# EAGLE board HM10 Breakout-Panel (EAGLE 9.6.2)
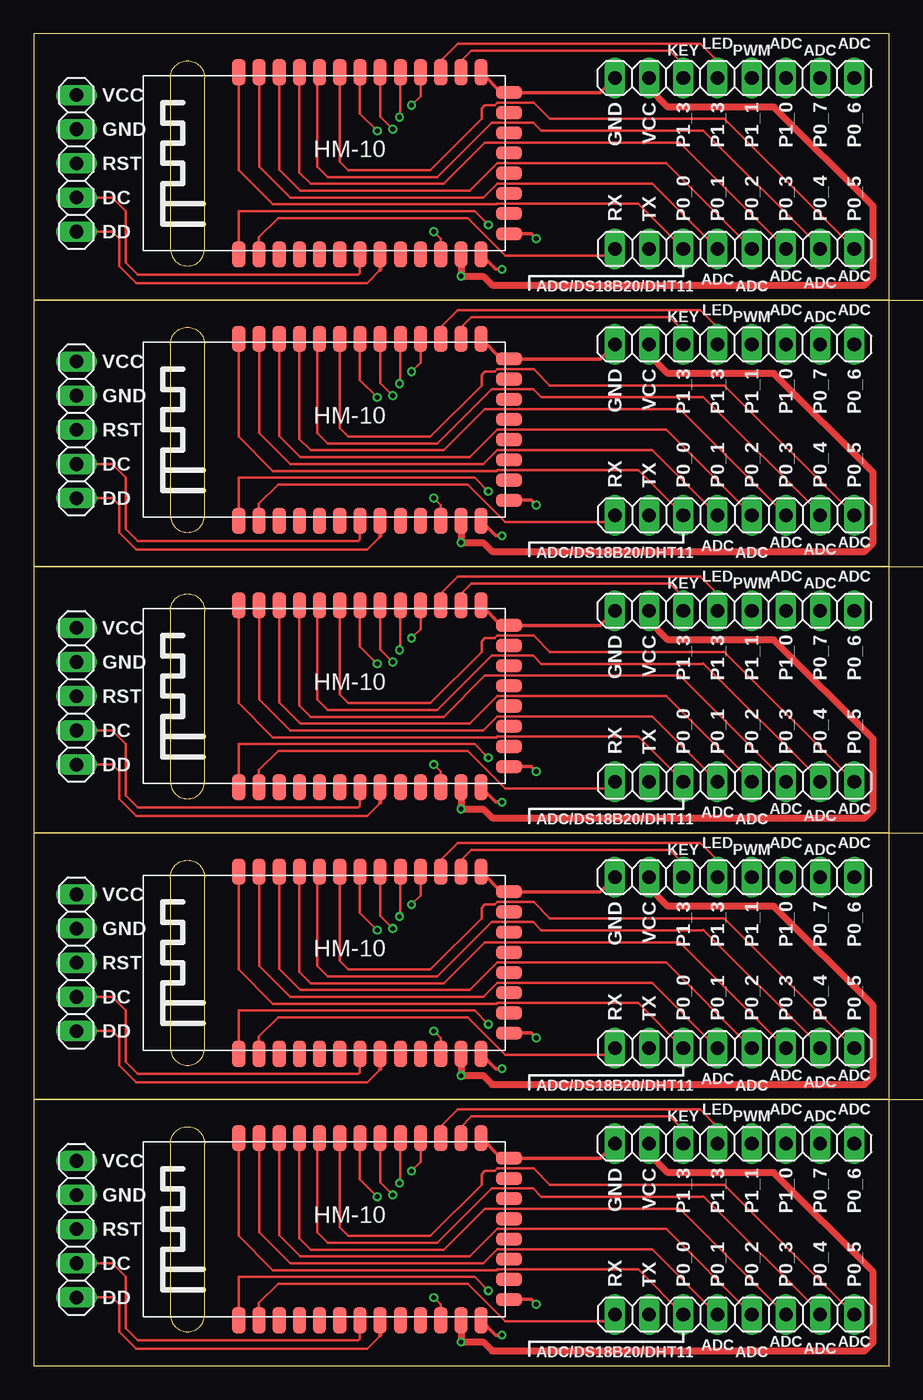
[diagram p0: board, top side]
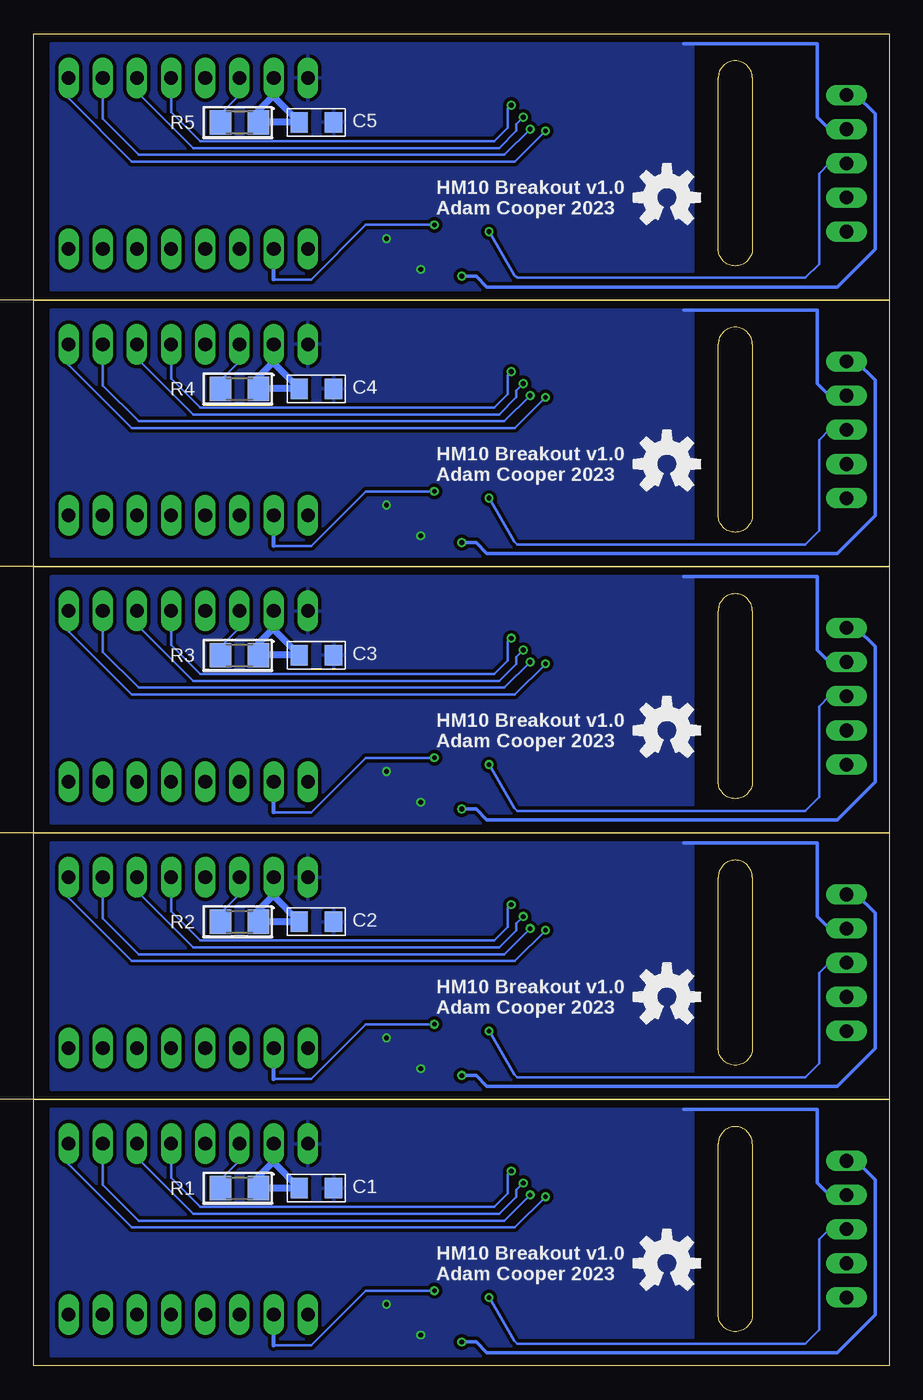
[diagram p1: board, bottom side, seen from below]

Size 63.55 x 99 mm. Coordinates in mm from the lower left corner, seen from the top.
Outline: 63.55,39.6 63.55,19.8 0,19.8 0,39.6
Outline: 63.55,39.6 0,39.6
Outline: 0,39.6 63.55,39.6
Outline: 63.55,39.6 63.55,59.4 0,59.4 0,39.6
Outline: 0,0 63.55,0 63.55,19.8 0,19.8 0,0
Outline: 0,59.4 63.55,59.4 63.55,79.2 0,79.2 0,59.4
Outline: 0,79.2 63.55,79.2 63.55,99 0,99 0,79.2
Copper layers (1*16): Top 0.035mm / dielectric 1.5mm / Bottom 0.035mm
Design rules "Seeed Fusion_eagle_rule_v1.1": minimum track width 6mil, minimum drill 12mil, track to track 6mil, track to pad 6mil, pad to pad 6mil, via to via 6mil, smd to smd 0mil, copper to edge 10mil, drill to drill 10mil, minimum pad ring 10mil, minimum via ring 6mil, stop-mask expansion 2mil, vias tented up to drill 100mil, thermal gap 10mil
Milling: 24 lines

## Footprints (pad centres in the part's own frame; a part is rotated, then mirrored left to right if it is on the bottom)
1206 = smd 1.27 x 1.524: 1 -1.27,0; 2 1.27,0
1X05 = drill 1.016 long: 1 -5.08,0; 2 -2.54,0; 3 0,0; 4 2.54,0; 5 5.08,0
1X08 = drill 1.016 long: 1 -8.89,0; 2 -6.35,0; 3 -3.81,0; 4 -1.27,0; 5 1.27,0; 6 3.81,0; 7 6.35,0; 8 8.89,0
R1206 = smd 1.6 x 1.803: 1 -1.422,0; 2 1.422,0
HM-10 = smd 1.93 x 0.965: 1 -6.77,6.35; 2 -6.77,4.85; 3 -6.77,3.35; 4 -6.77,1.85; 5 -6.77,0.35; 6 -6.77,-1.15; 7 -6.77,-2.65; 8 -6.77,-4.15; 9 -6.77,-5.65; 10 -6.77,-7.15; 11 -6.77,-8.65; 12 -6.77,-10.15; 13 -6.77,-11.65; 22 6.77,-11.65; 23 6.77,-10.15; 24 6.77,-8.65; 25 6.77,-7.15; 26 6.77,-5.65; 27 6.77,-4.15; 28 6.77,-2.65; 29 6.77,-1.15; 30 6.77,0.35; 31 6.77,1.85; 32 6.77,3.35; 33 6.77,4.85; 34 6.77,6.35 | smd 0.965 x 1.93: 14 -5.23,-13.72; 15 -3.73,-13.72; 16 -2.23,-13.72; 17 -0.73,-13.72; 18 0.77,-13.72; 19 2.27,-13.72; 20 3.77,-13.72; 21 5.27,-13.72

## Placement (x,y rotation side)
C1  100n  [1206]  42.55,13.21 0 bottom
C2  100n  [1206]  42.55,33.01 0 bottom
C3  100n  [1206]  42.55,52.81 0 bottom
C4  100n  [1206]  42.55,72.61 0 bottom
C5  100n  [1206]  42.55,92.41 0 bottom
JP1  [1X05]  3.17,10.16 90 top
JP2  [1X08]  52.07,3.81 0 top
JP3  [1X08]  52.07,16.51 180 top
JP4  [1X05]  3.17,29.96 90 top
JP5  [1X08]  52.07,23.61 0 top
JP6  [1X08]  52.07,36.31 180 top
JP7  [1X05]  3.17,49.76 90 top
JP8  [1X08]  52.07,43.41 0 top
JP9  [1X08]  52.07,56.11 180 top
JP10  [1X05]  3.17,69.56 90 top
JP11  [1X08]  52.07,63.21 0 top
JP12  [1X08]  52.07,75.91 180 top
JP13  [1X05]  3.17,89.36 90 top
JP14  [1X08]  52.07,83.01 0 top
JP15  [1X08]  52.07,95.71 180 top
LOGO1  OSHW-LOGOM  [OSHW-LOGO-M]  16.51,7.62 0 bottom
LOGO2  OSHW-LOGOM  [OSHW-LOGO-M]  16.51,27.42 0 bottom
LOGO3  OSHW-LOGOM  [OSHW-LOGO-M]  16.51,47.22 0 bottom
LOGO4  OSHW-LOGOM  [OSHW-LOGO-M]  16.51,67.02 0 bottom
LOGO5  OSHW-LOGOM  [OSHW-LOGO-M]  16.51,86.82 0 bottom
R1  1k  [R1206]  48.26,13.21 180 bottom
R2  1k  [R1206]  48.26,33.01 180 bottom
R3  1k  [R1206]  48.26,52.81 180 bottom
R4  1k  [R1206]  48.26,72.61 180 bottom
R5  1k  [R1206]  48.26,92.41 180 bottom
U1  HM-10  [HM-10]  21.59,10.16 90 top
U2  HM-10  [HM-10]  21.59,29.96 90 top
U3  HM-10  [HM-10]  21.59,49.76 90 top
U4  HM-10  [HM-10]  21.59,69.56 90 top
U5  HM-10  [HM-10]  21.59,89.36 90 top

## Library data of the parts
C1-C5 LOGO1-LOGO5 = Master 2016
JP1-JP15 = pinhead
R1-R5 = rcl; SPICEPREFIX: R
U1-U5 = SMD Stamp Modules

## Nets
DC: JP1.2 U1.7
DC1: JP4.2 U2.7
DC2: JP7.2 U3.7
DC3: JP10.2 U4.7
DC4: JP13.2 U5.7
DD: JP1.1 U1.8
DD1: JP4.1 U2.8
DD2: JP7.1 U3.8
DD3: JP10.1 U4.8
DD4: JP13.1 U5.8
GND: C1.2 JP1.4 JP3.8 U1.13 U1.14 U1.21 U1.22
GND1: C2.2 JP4.4 JP6.8 U2.13 U2.14 U2.21 U2.22
GND2: C3.2 JP7.4 JP9.8 U3.13 U3.14 U3.21 U3.22
GND3: C4.2 JP10.4 JP12.8 U4.13 U4.14 U4.21 U4.22
GND4: C5.2 JP13.4 JP15.8 U5.13 U5.14 U5.21 U5.22
P0_0: JP2.3 U1.34
P0_1: JP2.4 U1.33
P0_2: JP2.5 U1.32
P0_3: JP2.6 U1.31
P0_4: JP2.7 U1.30
P0_5: JP2.8 U1.29
P0_6: JP3.1 U1.28
P0_7: JP3.2 U1.27
P0_8: JP5.3 U2.34
P0_9: JP5.4 U2.33
P0_10: JP5.5 U2.32
P0_11: JP5.6 U2.31
P0_12: JP5.7 U2.30
P0_13: JP5.8 U2.29
P0_14: JP6.1 U2.28
P0_15: JP6.2 U2.27
P0_16: JP8.3 U3.34
P0_17: JP8.4 U3.33
P0_18: JP8.5 U3.32
P0_19: JP8.6 U3.31
P0_20: JP8.7 U3.30
P0_21: JP8.8 U3.29
P0_22: JP9.1 U3.28
P0_23: JP9.2 U3.27
P0_24: JP11.3 U4.34
P0_25: JP11.4 U4.33
P0_26: JP11.5 U4.32
P0_27: JP11.6 U4.31
P0_28: JP11.7 U4.30
P0_29: JP11.8 U4.29
P0_30: JP12.1 U4.28
P0_31: JP12.2 U4.27
P0_32: JP14.3 U5.34
P0_33: JP14.4 U5.33
P0_34: JP14.5 U5.32
P0_35: JP14.6 U5.31
P0_36: JP14.7 U5.30
P0_37: JP14.8 U5.29
P0_38: JP15.1 U5.28
P0_39: JP15.2 U5.27
P1_0: JP3.3 U1.26
P1_1: JP3.4 U1.25
P1_2: JP3.5 U1.24
P1_3: JP3.6 R1.2 U1.23
P1_4: JP6.3 U2.26
P1_5: JP6.4 U2.25
P1_6: JP6.5 U2.24
P1_7: JP6.6 R2.2 U2.23
P1_8: JP9.3 U3.26
P1_9: JP9.4 U3.25
P1_10: JP9.5 U3.24
P1_11: JP9.6 R3.2 U3.23
P1_12: JP12.3 U4.26
P1_13: JP12.4 U4.25
P1_14: JP12.5 U4.24
P1_15: JP12.6 R4.2 U4.23
P1_16: JP15.3 U5.26
P1_17: JP15.4 U5.25
P1_18: JP15.5 U5.24
P1_19: JP15.6 R5.2 U5.23
P2_0: U1.9
P2_1: U2.9
P2_2: U3.9
P2_3: U4.9
P2_4: U5.9
RST: JP1.3 U1.11
RST1: JP4.3 U2.11
RST2: JP7.3 U3.11
RST3: JP10.3 U4.11
RST4: JP13.3 U5.11
RX: JP2.1 U1.2
RX1: JP5.1 U2.2
RX2: JP8.1 U3.2
RX3: JP11.1 U4.2
RX4: JP14.1 U5.2
TX: JP2.2 U1.1
TX1: JP5.2 U2.1
TX2: JP8.2 U3.1
TX3: JP11.2 U4.1
TX4: JP14.2 U5.1
VCC: C1.1 JP1.5 JP3.7 R1.1 U1.12
VCC1: C2.1 JP4.5 JP6.7 R2.1 U2.12
VCC2: C3.1 JP7.5 JP9.7 R3.1 U3.12
VCC3: C4.1 JP10.5 JP12.7 R4.1 U4.12
VCC4: C5.1 JP13.5 JP15.7 R5.1 U5.12

## Tracks (layer width: path | path; a pad name or v marks a point on that pad's centre or on a via)
DC
  Top 0.203: U1.7 24.24,2.02 24.13,1.91 7.75,1.91 6.86,2.79 6.86,6.6 5.84,7.62 JP1.2
DC1
  Top 0.203: U2.7 24.24,21.81 24.13,21.7 7.75,21.7 6.86,22.59 6.86,26.4 5.84,27.42 JP4.2
DC2
  Top 0.203: U3.7 24.24,41.62 24.13,41.51 7.75,41.51 6.86,42.4 6.86,46.2 5.84,47.22 JP7.2
DC3
  Top 0.203: U4.7 24.24,61.41 24.13,61.3 7.75,61.3 6.86,62.19 6.86,66 5.84,67.02 JP10.2
DC4
  Top 0.203: U5.7 24.24,81.22 24.13,81.11 7.75,81.11 6.86,81.99 6.86,85.8 5.84,86.82 JP13.2
DD
  Top 0.203: JP1.1 5.84,5.08 6.35,4.57 6.35,2.54 7.62,1.27 24.77,1.27 25.74,2.25
  Top 0.305: U1.8 25.74,2.25
DD1
  Top 0.203: JP4.1 5.84,24.88 6.35,24.37 6.35,22.34 7.62,21.07 24.77,21.07 25.74,22.04
  Top 0.305: U2.8 25.74,22.04
DD2
  Top 0.203: JP7.1 5.84,44.68 6.35,44.17 6.35,42.14 7.62,40.87 24.77,40.87 25.74,41.85
  Top 0.305: U3.8 25.74,41.85
DD3
  Top 0.203: JP10.1 5.84,64.48 6.35,63.97 6.35,61.94 7.62,60.67 24.77,60.67 25.74,61.65
  Top 0.305: U4.8 25.74,61.65
DD4
  Top 0.203: JP13.1 5.84,84.28 6.35,83.77 6.35,81.74 7.62,80.47 24.77,80.47 25.74,81.44
  Top 0.305: U5.8 25.74,81.44
GND  (via drill 0.35 pad 0.61)
  Top 0.203: 34.74,15.43 U1.21
  Top 0.254: U1.13 34.34,2.29 v34.8,2.29 | U1.14 36.98,4.93 v37.34,4.57 | U1.21 42.1,15.43 JP3.8 | U1.22 34.74,15.43
  Bottom 0.152: JP1.4 4.45,12.7
  Bottom 0.254: 4.45,12.7 5.33,13.59 5.33,19.05 15.24,19.05
  pour Bottom (isolate 0.254): 14.61,19.05 14.61,0.76 62.23,0.76 62.23,19.05
GND1  (via drill 0.35 pad 0.61)
  Top 0.203: 34.74,35.23 U2.21
  Top 0.254: U2.13 34.34,22.09 v34.8,22.09 | U2.14 36.98,24.73 v37.34,24.37 | U2.21 42.1,35.23 JP6.8 | U2.22 34.74,35.23
  Bottom 0.152: JP4.4 4.45,32.5
  Bottom 0.254: 4.45,32.5 5.33,33.39 5.33,38.85 15.24,38.85
  pour Bottom (isolate 0.254): 14.61,38.85 14.61,20.56 62.23,20.56 62.23,38.85
GND2  (via drill 0.35 pad 0.61)
  Top 0.203: 34.74,55.03 U3.21
  Top 0.254: U3.13 34.34,41.89 v34.8,41.89 | U3.14 36.98,44.53 v37.34,44.17 | U3.21 42.1,55.03 JP9.8 | U3.22 34.74,55.03
  Bottom 0.152: JP7.4 4.45,52.3
  Bottom 0.254: 4.45,52.3 5.33,53.19 5.33,58.65 15.24,58.65
  pour Bottom (isolate 0.254): 14.61,58.65 14.61,40.36 62.23,40.36 62.23,58.65
GND3  (via drill 0.35 pad 0.61)
  Top 0.203: 34.74,74.83 U4.21
  Top 0.254: U4.13 34.34,61.69 v34.8,61.69 | U4.14 36.98,64.33 v37.34,63.97 | U4.21 42.1,74.83 JP12.8 | U4.22 34.74,74.83
  Bottom 0.152: JP10.4 4.45,72.1
  Bottom 0.254: 4.45,72.1 5.33,72.99 5.33,78.45 15.24,78.45
  pour Bottom (isolate 0.254): 14.61,78.45 14.61,60.16 62.23,60.16 62.23,78.45
GND4  (via drill 0.35 pad 0.61)
  Top 0.203: 34.74,94.63 U5.21
  Top 0.254: U5.13 34.34,81.49 v34.8,81.49 | U5.14 36.98,84.13 v37.34,83.77 | U5.21 42.1,94.63 JP15.8 | U5.22 34.74,94.63
  Bottom 0.152: JP13.4 4.45,91.9
  Bottom 0.254: 4.45,91.9 5.33,92.79 5.33,98.25 15.24,98.25
  pour Bottom (isolate 0.254): 14.61,98.25 14.61,79.96 62.23,79.96 62.23,98.25
P0_0
  Top 0.203: JP2.3 44.9,7.17 34.44,7.17 34.39,7.11 17.78,7.11 15.24,9.65 U1.34
P0_1
  Top 0.203: JP2.4 45.94,8.67 34.44,8.67 33.4,7.62 19.05,7.62 16.76,9.91 16.76,16.91 U1.33
P0_2
  Top 0.203: JP2.5 46.98,10.17 34.44,10.17 32.41,8.13 19.81,8.13 18.24,9.7 U1.32
P0_3
  Top 0.203: JP2.6 48.01,11.68 33.53,11.68 30.48,8.64 20.57,8.64 19.74,9.47 U1.31
P0_4
  Top 0.203: JP2.7 58.42,3.94 49.75,12.61 49.66,12.57 37.72,12.57 37.1,13.19 34.02,13.19 29.97,9.14 21.84,9.14 21.08,9.91 21.08,16.77 U1.30
P0_5
  Top 0.203: U1.29 22.74,10.28 23.37,9.65 29.46,9.65 33.27,13.46 33.27,14.22 33.53,14.48 34.26,14.48 34.44,14.67 37.15,14.67 38.35,13.46 51.31,13.46 JP2.8
P0_6  (via drill 0.35 pad 0.61)
  Top 0.203: v25.53,12.57 24.24,13.86 U1.28
  Bottom 0.203: JP3.1 60.96,14.99 56.26,10.29 27.81,10.29 v25.53,12.57
P0_7  (via drill 0.35 pad 0.61)
  Top 0.203: U1.27 25.74,13.63 v26.67,12.7
  Bottom 0.203: v26.67,12.7 28.57,10.79 55.75,10.79 58.42,13.46 JP3.2
P0_8
  Top 0.203: JP5.3 44.9,26.97 34.44,26.97 34.39,26.91 17.78,26.91 15.24,29.45 U2.34
P0_9
  Top 0.203: JP5.4 45.94,28.47 34.44,28.47 33.4,27.42 19.05,27.42 16.76,29.7 16.76,36.7 U2.33
P0_10
  Top 0.203: JP5.5 46.98,29.97 34.44,29.97 32.41,27.93 19.81,27.93 18.24,29.5 U2.32
P0_11
  Top 0.203: JP5.6 48.01,31.48 33.53,31.48 30.48,28.43 20.57,28.43 19.74,29.27 U2.31
P0_12
  Top 0.203: JP5.7 58.42,23.74 49.75,32.41 49.66,32.37 37.72,32.37 37.1,32.99 34.02,32.99 29.97,28.94 21.84,28.94 21.08,29.7 21.08,36.57 U2.30
P0_13
  Top 0.203: U2.29 22.74,30.08 23.37,29.45 29.46,29.45 33.27,33.26 33.27,34.02 33.53,34.28 34.26,34.28 34.44,34.47 37.15,34.47 38.35,33.26 51.31,33.26 JP5.8
P0_14  (via drill 0.35 pad 0.61)
  Top 0.203: v25.53,32.37 24.24,33.66 U2.28
  Bottom 0.203: JP6.1 60.96,34.78 56.26,30.09 27.81,30.09 v25.53,32.37
P0_15  (via drill 0.35 pad 0.61)
  Top 0.203: U2.27 25.74,33.43 v26.67,32.5
  Bottom 0.203: v26.67,32.5 28.57,30.59 55.75,30.59 58.42,33.26 JP6.2
P0_16
  Top 0.203: JP8.3 44.9,46.77 34.44,46.77 34.39,46.71 17.78,46.71 15.24,49.25 U3.34
P0_17
  Top 0.203: JP8.4 45.94,48.27 34.44,48.27 33.4,47.22 19.05,47.22 16.76,49.51 16.76,56.51 U3.33
P0_18
  Top 0.203: JP8.5 46.98,49.77 34.44,49.77 32.41,47.73 19.81,47.73 18.24,49.3 U3.32
P0_19
  Top 0.203: JP8.6 48.01,51.28 33.53,51.28 30.48,48.24 20.57,48.24 19.74,49.07 U3.31
P0_20
  Top 0.203: JP8.7 58.42,43.54 49.75,52.21 49.66,52.17 37.72,52.17 37.1,52.8 34.02,52.8 29.97,48.74 21.84,48.74 21.08,49.51 21.08,56.37 U3.30
P0_21
  Top 0.203: U3.29 22.74,49.88 23.37,49.25 29.46,49.25 33.27,53.06 33.27,53.83 33.53,54.08 34.26,54.08 34.44,54.27 37.15,54.27 38.35,53.06 51.31,53.06 JP8.8
P0_22  (via drill 0.35 pad 0.61)
  Top 0.203: v25.53,52.17 24.24,53.46 U3.28
  Bottom 0.203: JP9.1 60.96,54.59 56.26,49.89 27.81,49.89 v25.53,52.17
P0_23  (via drill 0.35 pad 0.61)
  Top 0.203: U3.27 25.74,53.23 v26.67,52.3
  Bottom 0.203: v26.67,52.3 28.57,50.4 55.75,50.4 58.42,53.06 JP9.2
P0_24
  Top 0.203: JP11.3 44.9,66.57 34.44,66.57 34.39,66.51 17.78,66.51 15.24,69.05 U4.34
P0_25
  Top 0.203: JP11.4 45.94,68.07 34.44,68.07 33.4,67.02 19.05,67.02 16.76,69.31 16.76,76.31 U4.33
P0_26
  Top 0.203: JP11.5 46.98,69.57 34.44,69.57 32.41,67.53 19.81,67.53 18.24,69.1 U4.32
P0_27
  Top 0.203: JP11.6 48.01,71.08 33.53,71.08 30.48,68.04 20.57,68.04 19.74,68.87 U4.31
P0_28
  Top 0.203: JP11.7 58.42,63.34 49.75,72.01 49.66,71.97 37.72,71.97 37.1,72.59 34.02,72.59 29.97,68.54 21.84,68.54 21.08,69.31 21.08,76.17 U4.30
P0_29
  Top 0.203: U4.29 22.74,69.68 23.37,69.05 29.46,69.05 33.27,72.86 33.27,73.62 33.53,73.88 34.26,73.88 34.44,74.07 37.15,74.07 38.35,72.86 51.31,72.86 JP11.8
P0_30  (via drill 0.35 pad 0.61)
  Top 0.203: v25.53,71.97 24.24,73.26 U4.28
  Bottom 0.203: JP12.1 60.96,74.39 56.26,69.69 27.81,69.69 v25.53,71.97
P0_31  (via drill 0.35 pad 0.61)
  Top 0.203: U4.27 25.74,73.03 v26.67,72.1
  Bottom 0.203: v26.67,72.1 28.57,70.19 55.75,70.19 58.42,72.86 JP12.2
P0_32
  Top 0.203: JP14.3 44.9,86.37 34.44,86.37 34.39,86.31 17.78,86.31 15.24,88.85 U5.34
P0_33
  Top 0.203: JP14.4 45.94,87.87 34.44,87.87 33.4,86.82 19.05,86.82 16.76,89.11 16.76,96.11 U5.33
P0_34
  Top 0.203: JP14.5 46.98,89.37 34.44,89.37 32.41,87.33 19.81,87.33 18.24,88.9 U5.32
P0_35
  Top 0.203: JP14.6 48.01,90.88 33.53,90.88 30.48,87.84 20.57,87.84 19.74,88.67 U5.31
P0_36
  Top 0.203: JP14.7 58.42,83.14 49.75,91.81 49.66,91.77 37.72,91.77 37.1,92.39 34.02,92.39 29.97,88.34 21.84,88.34 21.08,89.11 21.08,95.97 U5.30
P0_37
  Top 0.203: U5.29 22.74,89.48 23.37,88.85 29.46,88.85 33.27,92.66 33.27,93.42 33.53,93.68 34.26,93.68 34.44,93.87 37.15,93.87 38.35,92.66 51.31,92.66 JP14.8
P0_38  (via drill 0.35 pad 0.61)
  Top 0.203: v25.53,91.77 24.24,93.06 U5.28
  Bottom 0.203: JP15.1 60.96,94.19 56.26,89.49 27.81,89.49 v25.53,91.77
P0_39  (via drill 0.35 pad 0.61)
  Top 0.203: U5.27 25.74,92.83 v26.67,91.9
  Bottom 0.203: v26.67,91.9 28.57,90 55.75,90 58.42,92.66 JP15.2
P1_0  (via drill 0.35 pad 0.61)
  Top 0.203: U1.26 27.24,13.65 v27.18,13.59
  Bottom 0.203: JP3.3 55.88,15.49 51.69,11.3 28.96,11.3 27.69,12.57 27.69,13.08 v27.18,13.59
P1_1  (via drill 0.35 pad 0.61)
  Top 0.203: U1.25 28.74,15.15 v28.07,14.48
  Bottom 0.203: v28.07,14.48 28.32,14.22 28.32,12.83 29.34,11.81 51.18,11.81 53.34,13.97 JP3.4
P1_2
  Top 0.203: U1.24 30.24,17.79 31.5,19.05 49.53,19.05 50.8,17.78 JP3.5
P1_3
  Top 0.203: U1.23 31.75,17.78 32.51,18.54 47.24,18.54 48.26,17.53 JP3.6
  Bottom 0.203: JP3.6 48.26,15.24 49.68,13.82 R1.2
P1_4  (via drill 0.35 pad 0.61)
  Top 0.203: U2.26 27.24,33.45 v27.18,33.39
  Bottom 0.203: JP6.3 55.88,35.29 51.69,31.1 28.96,31.1 27.69,32.37 27.69,32.88 v27.18,33.39
P1_5  (via drill 0.35 pad 0.61)
  Top 0.203: U2.25 28.74,34.95 v28.07,34.28
  Bottom 0.203: v28.07,34.28 28.32,34.02 28.32,32.63 29.34,31.61 51.18,31.61 53.34,33.77 JP6.4
P1_6
  Top 0.203: U2.24 30.24,37.59 31.5,38.85 49.53,38.85 50.8,37.58 JP6.5
P1_7
  Top 0.203: U2.23 31.75,37.58 32.51,38.34 47.24,38.34 48.26,37.33 JP6.6
  Bottom 0.203: JP6.6 48.26,35.04 49.68,33.62 R2.2
P1_8  (via drill 0.35 pad 0.61)
  Top 0.203: U3.26 27.24,53.25 v27.18,53.19
  Bottom 0.203: JP9.3 55.88,55.09 51.69,50.9 28.96,50.9 27.69,52.17 27.69,52.68 v27.18,53.19
P1_9  (via drill 0.35 pad 0.61)
  Top 0.203: U3.25 28.74,54.75 v28.07,54.08
  Bottom 0.203: v28.07,54.08 28.32,53.83 28.32,52.43 29.34,51.41 51.18,51.41 53.34,53.57 JP9.4
P1_10
  Top 0.203: U3.24 30.24,57.4 31.5,58.65 49.53,58.65 50.8,57.38 JP9.5
P1_11
  Top 0.203: U3.23 31.75,57.38 32.51,58.14 47.24,58.14 48.26,57.13 JP9.6
  Bottom 0.203: JP9.6 48.26,54.84 49.68,53.42 R3.2
P1_12  (via drill 0.35 pad 0.61)
  Top 0.203: U4.26 27.24,73.05 v27.18,72.99
  Bottom 0.203: JP12.3 55.88,74.89 51.69,70.7 28.96,70.7 27.69,71.97 27.69,72.48 v27.18,72.99
P1_13  (via drill 0.35 pad 0.61)
  Top 0.203: U4.25 28.74,74.55 v28.07,73.88
  Bottom 0.203: v28.07,73.88 28.32,73.62 28.32,72.23 29.34,71.21 51.18,71.21 53.34,73.37 JP12.4
P1_14
  Top 0.203: U4.24 30.24,77.19 31.5,78.45 49.53,78.45 50.8,77.18 JP12.5
P1_15
  Top 0.203: U4.23 31.75,77.18 32.51,77.94 47.24,77.94 48.26,76.93 JP12.6
  Bottom 0.203: JP12.6 48.26,74.64 49.68,73.22 R4.2
P1_16  (via drill 0.35 pad 0.61)
  Top 0.203: U5.26 27.24,92.85 v27.18,92.79
  Bottom 0.203: JP15.3 55.88,94.69 51.69,90.5 28.96,90.5 27.69,91.77 27.69,92.28 v27.18,92.79
P1_17  (via drill 0.35 pad 0.61)
  Top 0.203: U5.25 28.74,94.35 v28.07,93.68
  Bottom 0.203: v28.07,93.68 28.32,93.42 28.32,92.03 29.34,91.01 51.18,91.01 53.34,93.17 JP15.4
P1_18
  Top 0.203: U5.24 30.24,96.99 31.5,98.25 49.53,98.25 50.8,96.98 JP15.5
P1_19
  Top 0.203: U5.23 31.75,96.98 32.51,97.74 47.24,97.74 48.26,96.73 JP15.6
  Bottom 0.203: JP15.6 48.26,94.44 49.68,93.02 R5.2
RST  (via drill 0.35 pad 0.61)
  Top 0.203: U1.11 30.24,4.56 v29.72,5.08
  Bottom 0.203: v29.72,5.08 27.85,1.87 27.63,1.65 6.22,1.65 5.21,2.67 5.21,9.4 4.45,10.16
  Bottom 0.305: 4.45,10.16 JP1.3
RST1  (via drill 0.35 pad 0.61)
  Top 0.203: U2.11 30.24,24.36 v29.72,24.88
  Bottom 0.203: v29.72,24.88 27.85,21.67 27.63,21.45 6.22,21.45 5.21,22.47 5.21,29.2 4.45,29.96
  Bottom 0.305: 4.45,29.96 JP4.3
RST2  (via drill 0.35 pad 0.61)
  Top 0.203: U3.11 30.24,44.16 v29.72,44.68
  Bottom 0.203: v29.72,44.68 27.85,41.47 27.63,41.25 6.22,41.25 5.21,42.27 5.21,49 4.45,49.76
  Bottom 0.305: 4.45,49.76 JP7.3
RST3  (via drill 0.35 pad 0.61)
  Top 0.203: U4.11 30.24,63.96 v29.72,64.48
  Bottom 0.203: v29.72,64.48 27.85,61.27 27.63,61.05 6.22,61.05 5.21,62.07 5.21,68.8 4.45,69.56
  Bottom 0.305: 4.45,69.56 JP10.3
RST4  (via drill 0.35 pad 0.61)
  Top 0.203: U5.11 30.24,83.76 v29.72,84.28
  Bottom 0.203: v29.72,84.28 27.85,81.07 27.63,80.85 6.22,80.85 5.21,81.87 5.21,88.6 4.45,89.36
  Bottom 0.305: 4.45,89.36 JP13.3
RX
  Top 0.203: U1.2 16.74,4.67 18.16,6.1 32.26,6.1 35.05,3.3 42.67,3.3
  Top 0.305: 42.67,3.3 JP2.1
RX1
  Top 0.203: U2.2 16.74,24.47 18.16,25.89 32.26,25.89 35.05,23.1 42.67,23.1
  Top 0.305: 42.67,23.1 JP5.1
RX2
  Top 0.203: U3.2 16.74,44.28 18.16,45.7 32.26,45.7 35.05,42.9 42.67,42.9
  Top 0.305: 42.67,42.9 JP8.1
RX3
  Top 0.203: U4.2 16.74,64.08 18.16,65.5 32.26,65.5 35.05,62.7 42.67,62.7
  Top 0.305: 42.67,62.7 JP11.1
RX4
  Top 0.203: U5.2 16.74,83.88 18.16,85.3 32.26,85.3 35.05,82.5 42.67,82.5
  Top 0.305: 42.67,82.5 JP14.1
TX  (via drill 0.35 pad 0.61)
  Top 0.203: U1.1 15.24,6.6 32.77,6.6 v33.78,5.59
  Bottom 0.203: v33.78,5.59 38.86,5.59 42.93,1.52 45.72,1.52
  Bottom 0.305: 45.72,1.52 JP2.2
TX1  (via drill 0.35 pad 0.61)
  Top 0.203: U2.1 15.24,26.4 32.77,26.4 v33.78,25.39
  Bottom 0.203: v33.78,25.39 38.86,25.39 42.93,21.32 45.72,21.32
  Bottom 0.305: 45.72,21.32 JP5.2
TX2  (via drill 0.35 pad 0.61)
  Top 0.203: U3.1 15.24,46.2 32.77,46.2 v33.78,45.19
  Bottom 0.203: v33.78,45.19 38.86,45.19 42.93,41.12 45.72,41.12
  Bottom 0.305: 45.72,41.12 JP8.2
TX3  (via drill 0.35 pad 0.61)
  Top 0.203: U4.1 15.24,66 32.77,66 v33.78,64.99
  Bottom 0.203: v33.78,64.99 38.86,64.99 42.93,60.92 45.72,60.92
  Bottom 0.305: 45.72,60.92 JP11.2
TX4  (via drill 0.35 pad 0.61)
  Top 0.203: U5.1 15.24,85.8 32.77,85.8 v33.78,84.79
  Bottom 0.203: v33.78,84.79 38.86,84.79 42.93,80.72 45.72,80.72
  Bottom 0.305: 45.72,80.72 JP14.2
VCC  (via drill 0.35 pad 0.61)
  Top 0.203: JP3.7 45.72,15.75
  Top 0.305: U1.12
  Top 0.508: U1.12 v31.75,1.78 33.4,1.78 34.06,1.12 61.72,1.12 62.36,1.75 62.36,6.99 54.99,14.35 47.12,14.35 45.72,15.75
  Bottom 0.254: v31.75,1.78 30.68,1.78 29.87,0.97 3.86,0.97 1.04,3.79 1.04,13.84 2.44,15.24
  Bottom 0.305: 2.44,15.24 JP1.5 | 45.72,15.11 JP3.7 45.72,15.21 | R1.1 46.84,14.1
  Bottom 0.508: 45.72,15.11 C1.1 R1.1 | 46.84,14.1 45.72,15.21
VCC1  (via drill 0.35 pad 0.61)
  Top 0.203: JP6.7 45.72,35.55
  Top 0.305: U2.12 31.75,23.18
  Top 0.508: 31.75,23.18 v31.75,21.58 33.4,21.58 34.06,20.92 61.72,20.92 62.36,21.55 62.36,26.78 54.99,34.15 47.12,34.15 45.72,35.55
  Bottom 0.254: v31.75,21.58 30.68,21.58 29.87,20.77 3.86,20.77 1.04,23.58 1.04,33.64 2.44,35.04
  Bottom 0.305: 2.44,35.04 JP4.5 | 45.72,34.91 JP6.7 45.72,35.01 | R2.1 46.84,33.9
  Bottom 0.508: 45.72,34.91 C2.1 R2.1 | 46.84,33.9 45.72,35.01
VCC2  (via drill 0.35 pad 0.61)
  Top 0.203: JP9.7 45.72,55.35
  Top 0.305: U3.12
  Top 0.508: U3.12 v31.75,41.38 33.4,41.38 34.06,40.72 61.72,40.72 62.36,41.35 62.36,46.59 54.99,53.95 47.12,53.95 45.72,55.35
  Bottom 0.254: v31.75,41.38 30.68,41.38 29.87,40.57 3.86,40.57 1.04,43.39 1.04,53.44 2.44,54.84
  Bottom 0.305: 2.44,54.84 JP7.5 | 45.72,54.71 JP9.7 45.72,54.82 | R3.1 46.84,53.7
  Bottom 0.508: 45.72,54.71 C3.1 R3.1 | 46.84,53.7 45.72,54.82
VCC3  (via drill 0.35 pad 0.61)
  Top 0.203: JP12.7 45.72,75.15
  Top 0.305: U4.12
  Top 0.508: U4.12 v31.75,61.18 33.4,61.18 34.06,60.52 61.72,60.52 62.36,61.15 62.36,66.39 54.99,73.75 47.12,73.75 45.72,75.15
  Bottom 0.254: v31.75,61.18 30.68,61.18 29.87,60.37 3.86,60.37 1.04,63.19 1.04,73.24 2.44,74.64
  Bottom 0.305: 2.44,74.64 JP10.5 | 45.72,74.51 JP12.7 45.72,74.61 | R4.1 46.84,73.5
  Bottom 0.508: 45.72,74.51 C4.1 R4.1 | 46.84,73.5 45.72,74.61
VCC4  (via drill 0.35 pad 0.61)
  Top 0.203: JP15.7 45.72,94.95
  Top 0.305: U5.12
  Top 0.508: U5.12 v31.75,80.98 33.4,80.98 34.06,80.32 61.72,80.32 62.36,80.95 62.36,86.19 54.99,93.55 47.12,93.55 45.72,94.95
  Bottom 0.254: v31.75,80.98 30.68,80.98 29.87,80.17 3.86,80.17 1.04,82.98 1.04,93.04 2.44,94.44
  Bottom 0.305: 2.44,94.44 JP13.5 | 45.72,94.31 JP15.7 45.72,94.42 | R5.1 46.84,93.3
  Bottom 0.508: 45.72,94.31 C5.1 R5.1 | 46.84,93.3 45.72,94.42

## Text on the board
tPlace: KEY | LED | PWM | ADC | ADC | ADC | VCC | GND | VCC | P1_3 | P1_3 | P1_1 | P1_0 | P0_7 | P0_6 | GND | RST | DC | RX | TX | P0_0 | P0_1 | P0_2 | P0_3 | P0_4 | P0_5 | DD | ADC | ADC | ADC | ADC/DS18B20/DHT11 | ADC | ADC | KEY | LED | PWM | ADC | ADC | ADC | VCC | GND | VCC | P1_3 | P1_3 | P1_1 | P1_0 | P0_7 | P0_6 | GND | RST | DC | RX | TX | P0_0 | P0_1 | P0_2 | P0_3 | P0_4 | P0_5 | DD | ADC | ADC | ADC | ADC | ADC/DS18B20/DHT11 | ADC | LED | ADC | ADC | KEY | PWM | ADC | VCC | GND | VCC | P1_3 | P1_3 | P1_1 | P1_0 | P0_7 | P0_6 | GND | RST | DC | DD | RX | TX | P0_0 | P0_1 | P0_2 | P0_3 | P0_4 | P0_5 | ADC/DS18B20/DHT11 | ADC | ADC | ADC | ADC | ADC | LED | ADC | ADC | KEY | PWM | ADC | VCC | GND | VCC | P1_3 | P1_3 | P1_1 | P1_0 | P0_7 | P0_6 | GND | RST | DC | RX | TX | P0_0 | P0_1 | P0_2 | P0_3 | P0_4 | P0_5 | DD | ADC | ADC | ADC/DS18B20/DHT11 | ADC | ADC | ADC | KEY | LED | PWM | ADC | ADC | ADC | VCC | GND | VCC | P1_3 | P1_3 | P1_1 | P1_0 | P0_7 | P0_6 | GND | RST | DC | RX | TX | P0_0 | P0_1 | P0_2 | P0_3 | P0_4 | P0_5 | DD | ADC | ADC | ADC | ADC/DS18B20/DHT11 | ADC | ADC
bNames: HM10 Breakout v1.0 / Adam Cooper 2023 | HM10 Breakout v1.0 / Adam Cooper 2023 | HM10 Breakout v1.0 / Adam Cooper 2023 | HM10 Breakout v1.0 / Adam Cooper 2023 | HM10 Breakout v1.0 / Adam Cooper 2023
Milling: v-score | v-score | v-score | v-score